# Altium PCB board.PcbDoc
Units mm, origin at the board's own origin, x right, y up, seen from the top; angles counter-clockwise.
Board outline 30 x 20 mm, 2 copper layers (Top Layer, Bottom Layer), stack 0.97 mm thick; 44 components, 34 nets, 193 pads, 61 vias.
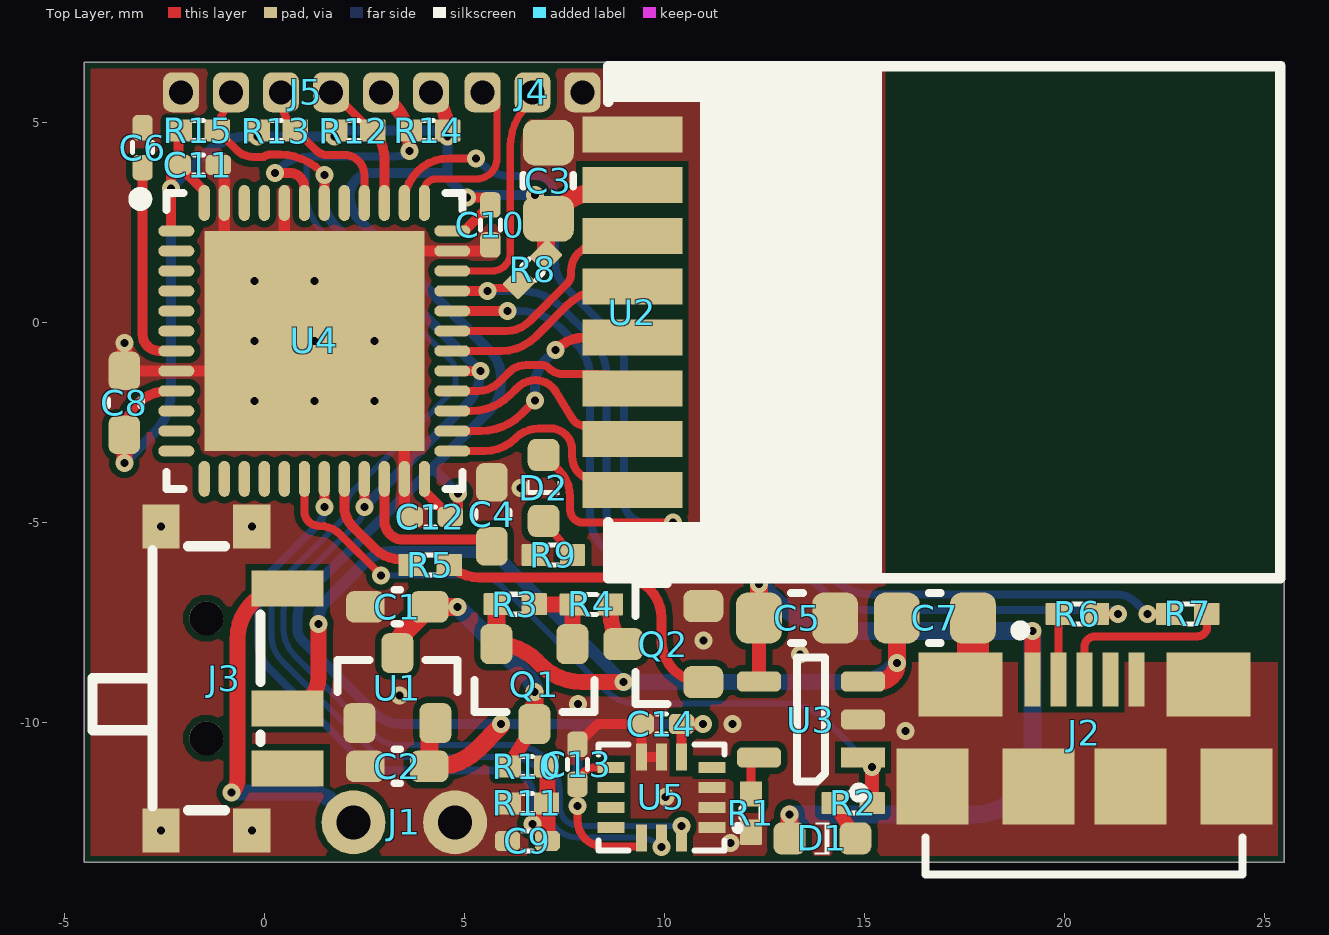
[diagram p0: Top Layer view]
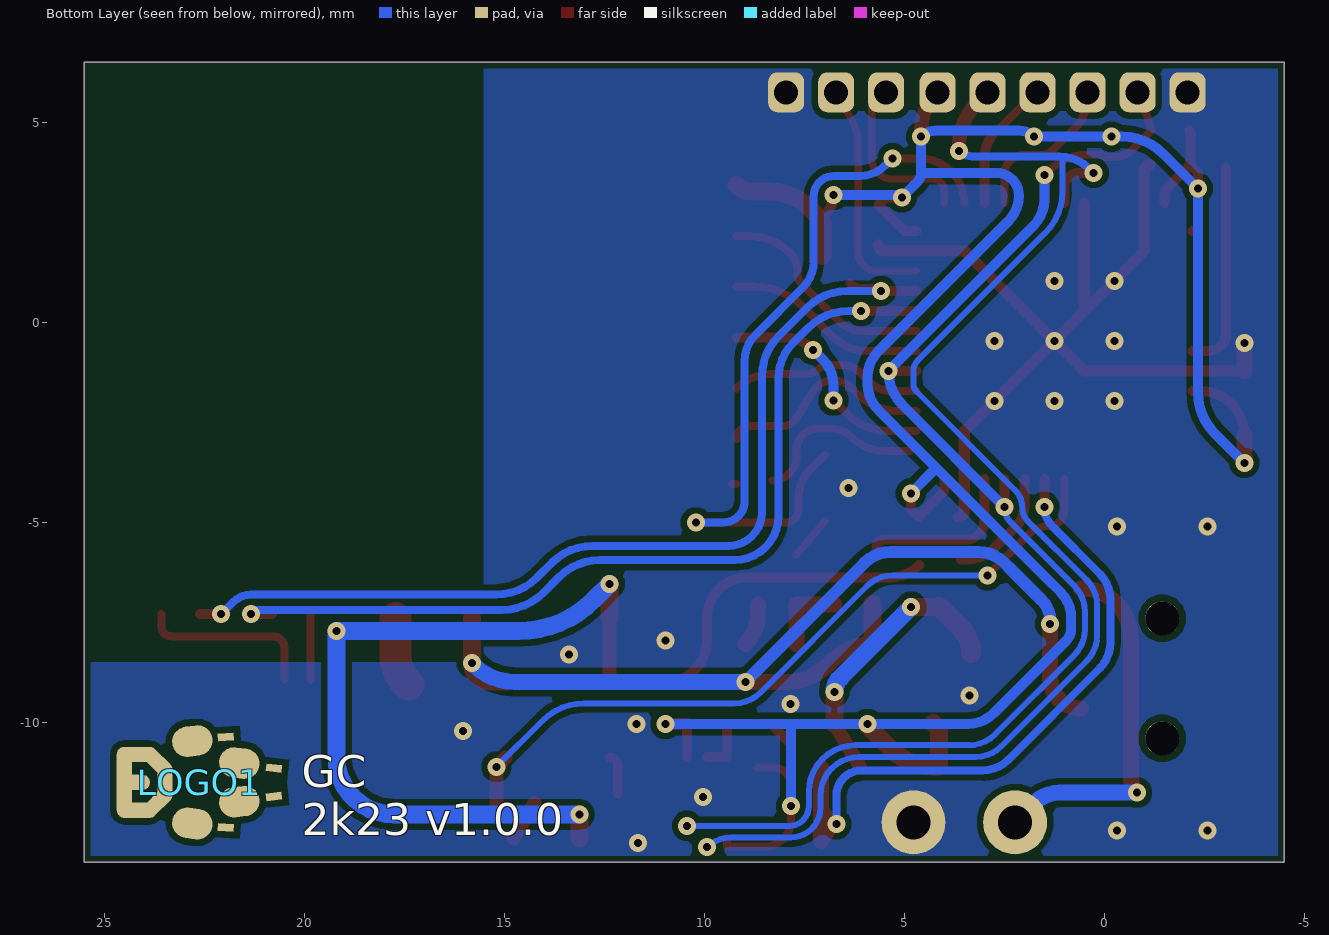
[diagram p1: Bottom Layer view, seen from below]
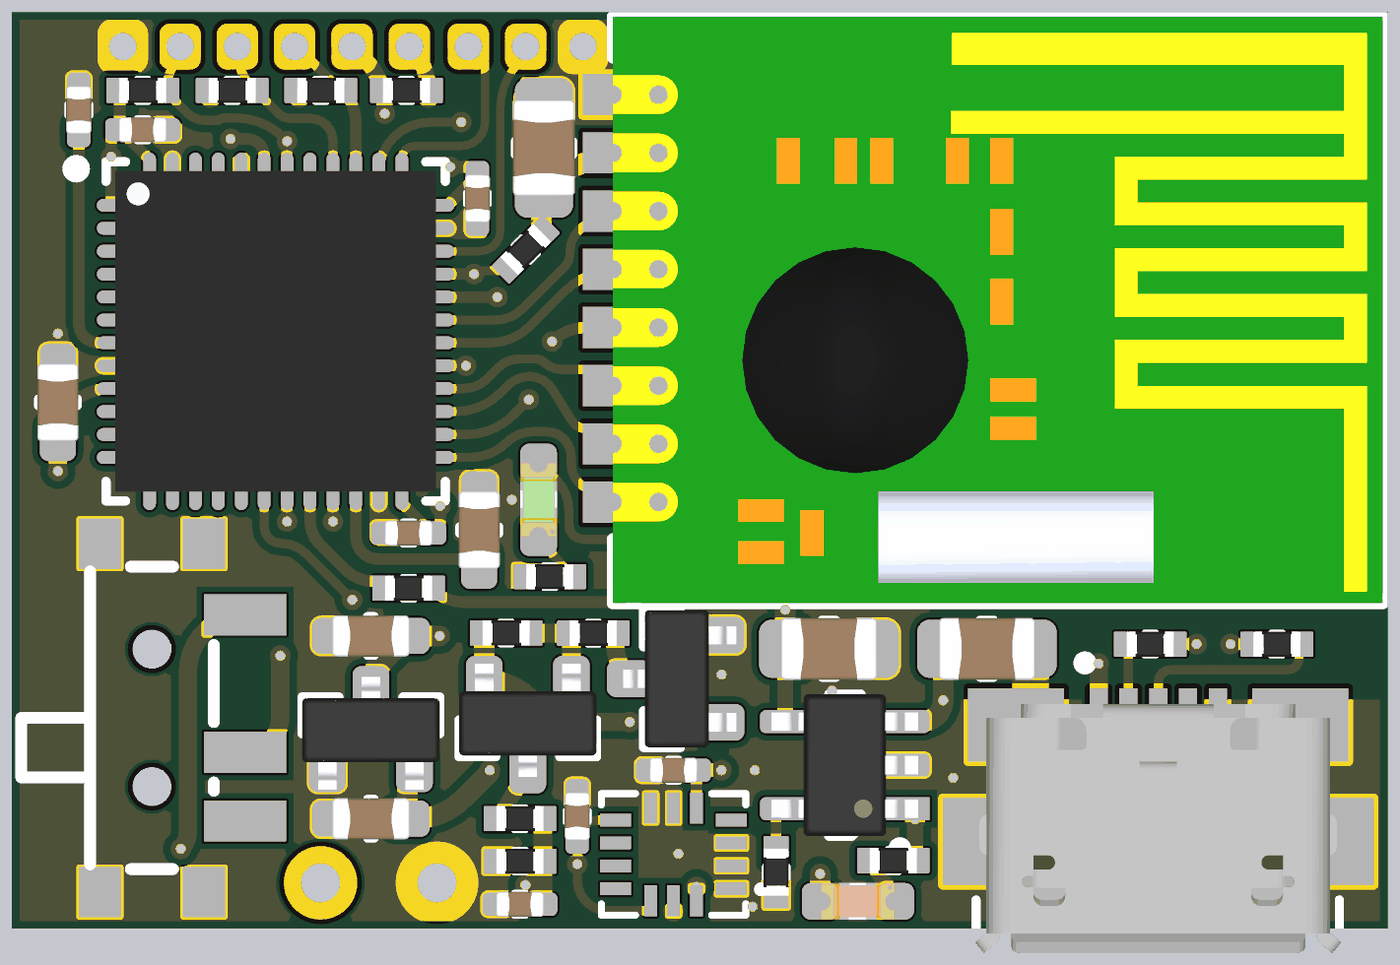
[diagram p2: 3D render of the assembled board from above, using the file's embedded part models]

## Layer stack, top to bottom
Top Solder: solder mask 0.0127, Solder Resist, Dk 3.8
Top Layer: signal copper 0.035
Dielectric: core 0.9, FR-4, Dk 4.5
Bottom Layer: signal copper 0.035
Bottom Solder: solder mask 0.0127, Solder Resist, Dk 3.8

## Board outline
-4.5,-13.5 25.5,-13.5 25.5,6.5 -4.5,6.5

## Design rules (kind name [scope] priority, off if disabled: settings)
AcuteAngle [All] p1: minimum=6.00000000000000E+0001 checktracksonly=FALSE
Clearance [All] p1: gap=0.16 ignorepadtopadclearanceinfootprint=FALSE except(0.13: Arc-Arc Arc-Track Arc-SMDPad Arc-Via Track-Track Track-SMDPad Track-Via SMDPad-SMDPad SMDPad-Via THPad-Via Via-Via; 0.15: Arc-THPad Arc-Text Arc-Hole Track-THPad Track-Text Track-Hole SMDPad-THPad SMDPad-Text SMDPad-Hole THPad-THPad THPad-Text THPad-Hole Via-Text Via-Hole Fill-Text Fill-Hole Poly-Text Poly-Hole Region-Text Region-Hole Text-Text Text-Hole)
ComponentClearance ComponentClearance_1 [HasFootprint('HDR-1X6_2.54') or HasFootprint('HDR-1x3-P1.25') or HasFootprint('HDR-1x6-P1.25') or HasFootprint('HDR-1X2_2.54') OR HasFootprint('LED-0603-RED') or HasFootprint('SOT-23')] p1: gap=-1 collisioncheckmode=3 verticalgap=2540 showdistances=FALSE
ComponentClearance ComponentClearance_2 [HasFootprint('TP2030_SMD')] p2: gap=-1 collisioncheckmode=3 verticalgap=2540 showdistances=FALSE
ComponentClearance [All] p3: gap=0.3 collisioncheckmode=3 verticalgap=0.254 showdistances=FALSE
HoleSize [All] p1: absolutevalues=TRUE maxlimit=6 minlimit=0.2 maxpercent=80.000 minpercent=20.000
HoleToHoleClearance HoleToHoleClearance_1 [IsVia vs IsThruPin] p1: gap=0.7 allowstackedmicrovias=TRUE
HoleToHoleClearance [All] p2: gap=0.5 allowstackedmicrovias=TRUE
MinimumSolderMaskSliver [All] p1 off: minsoldermaskwidth=0.254
PlaneClearance [All] p1: clearance=0.45
PlaneConnect [All] p1: planeconnectstyle=Direct reliefexpansion=0.3 reliefentries=4 reliefconductorwidth=0.381 reliefairgap=0.178
PolygonConnect [All] p1: connectstyle=Direct reliefconductorwidth=0.381 reliefentries=4 polygonreliefangle="90 Angle" airgapwidth=0.356
RoutingVias [All] p1: holewidth=0.3 width=0.6 viastyle="Through Hole" minholewidth=0.2 minwidth=0.45 maxholewidth=0.9 maxwidth=1.27
SilkToSilkClearance [All] p1 off: silktosilkclearance=0.254
SilkToSolderMaskClearance [IsPad] p1 off: minsilkscreentomaskgap=0.254 clearancetoexposedcopper=TRUE
SolderMaskExpansion [All] p1: expansion=0.102 istentingtop=FALSE
UnRoutedNet [All] p1: checkbadconnections=TRUE
Width [All] p1: maxlimit=3.81 minlimit=0.14 preferedwidth=0.254
21 further rules are at their usual default settings.

## Classes and differential pairs
component class schematic: C1 C2 C3 C4 C5 C6 C7 C8 C9 C10 C11 C12 C13 C14 D1 D2 J1 J2 J3 J4 J5 LOGO1 Q1 Q2 R1 R2 R4 R7 R9 R10 R11 R12 R13 R14 R15 U1 U2 U3 U4 U5

## Components (designator, comment, footprint, x,y, rotation, side; value= is the part's Value field where it differs from the comment)
C1 "10uF" C0603 3.327,-7.112 r0 top
C2 "10uF" C0603 3.327,-11.1 r0 top
C3 "10uF" C0805 7.101,3.539 r270 top
C4 "2.2u" C0603 5.69,-4.801 r270 top
C5 "1u" C0805 13.318,-7.391 r180 top
C6 "100nF" C0402 -3.044,4.367 r270 top
C7 "1u" C0805 16.764,-7.391 r180 top
C8 "2.2u" C0603 -3.5,-2.015 r270 top
C9 "100n" C0402 6.579,-12.967 r0 top
C10 "100nF" C0402 5.65,2.435 r90 top
C11 "100nF" C0402 -1.65,3.935 r180 top
C12 "100nF" C0402 4.15,-4.865 r0 top
C13 "100nF" C0402 7.828,-11.049 r270 top
C14 "100nF" C0402 9.928,-10.041 r0 top
D1 "RED" LED-0603-RED 13.95,-12.903 r180 top
D2 "GRN" LED-0603-GRN 6.985,-4.14 r90 top
J1 "Header 2" HDR-1X2_2.54 3.5,-12.5 r90 top
J2 "MICROQTJ" CONN-USB-MICRO_#1 20.5,-8.25 r270 top
J3 "MK-12C02-G025" SW-SMD_MK-12C02-G025 -1,-8.9 r270 top
J4 "SWD" HDR-1x3-P1.25 6.703,5.75 r0 top
J5 "CONN" HDR-1x6-P1.25 1.041,5.75 r180 top
LOGO1 "LOGO" LOGO 24.5,-11.5 r270 bottom
Q1 "IRLML6402" SOT-23#1 6.75,-9.046 r90 top
Q2 "IRLML2502" SOT-23#1 9.974,-8.046 r0 top
R1 "10k" R0402 12.167,-12.268 r270 top
R2 "220" R0402 14.722,-12.014 r180 top
R3 "100k" R0402 6.276,-7.048 r180 top
R4 "100" R0402 8.176,-7.051 r180 top
R5 "100" R0402 4.15,-6.071 r0 top
R6 "22" R0402 20.326,-7.29 r180 top
R7 "22" R0402 23.089,-7.29 r0 top
R8 "1k5" R0402 6.706,1.321 r225 top
R9 "220" R0402 7.227,-5.817 r0 top
R10 "1M" R0402 6.579,-11.1 r180 top
R11 "470k" R0402 6.579,-12.028 r0 top
R12 "2k" R0402 2.235,4.794 r0 top
R13 "2k" R0402 0.301,4.794 r0 top
R14 "2k" R0402 4.105,4.794 r180 top
R15 "2k" R0402 -1.65,4.794 r0 top
U1 "XC6206P332MR" SOT-23#2 3.327,-9.144 r270 top
U2 "RFM75" RFM75 17,0 r270 top
U3 "LGS4084HB5" SOT-23-5 13.665,-9.931 r0 top
U4 "STM32F401CBU6" UFQFPN-48_L7.0-W7.0 1.25,-0.465 r270 top
U5 "LSM6DSOTR" LGA-14_L3.0-W2.5-P0.50-TL 9.928,-11.879 r180 top

## Footprints (in the part's own frame and the unit in brackets; to place one, negate y for a bottom-side part, rotate by r counter-clockwise, add the part's x,y. Pads: shape width x height; smd on the part's side, far side on the other; paste and mask are expansions set on the pad)
C0402 [mm] "Chip Capacitor Body"
  rrect50% 0.635x0.508 smd mask+0.05: 1(-0.5,0) 2(0.5,0)
  silkscreen extent -0.13,-0.25 0.13,0.25, body extent -0.52,-0.27 0.53,0.28, height 0.55
C0603 [mil] "Chip Capacitor"
  rrect50% 38x31 smd mask+1.97: 1(-31.5,0) 2(31.5,0)
  silkscreen extent -3,-17 3,17, body extent -33,-18 33,18, height 35
C0805 [mil] "Chip Capacitor"
  rrect50% 45x50 smd mask+1.97: 1(-37.5,0) 2(37.5,0)
  silkscreen extent -6,-25 6,25, body extent -41,-27 41,27, height 53
CONN-USB-MICRO_#1 [mm] "Connector; USB2.0, Type B, SM; 5 Position; Right Angle"
  rect 1.35x0.4 smd: 1(0.675,-1.3) 2(0.675,-0.65) 3(0.675,0) 4(0.675,0.65) 5(0.675,1.3)
  rect 1.6x2.1 smd: 6(0.8,3.1) 6(0.8,-3.1)
  rect 1.9x1.8 smd: 6(3.35,3.8) 6(3.35,-1.15) 6(3.35,1.15) 6(3.35,-3.8)
  silkscreen extent -0.67,-3.98 5.55,3.95, body extent 0.35,-3.99 5.78,3.99, height 2.69
HDR-1X2_2.54 [mm]
  round 1.6 hole 0.85: 1(0,1.27) 2(0,-1.27)
HDR-1x3-P1.25 [mm]
  rrect50% 0.9x1 hole 0.6: 1(-1.25,0) 2(0,0) 3(1.25,0)
HDR-1x6-P1.25 [mm]
  rrect50% 0.9x1 hole 0.6: 1(-3.125,0) 2(-1.875,0) 3(-0.625,0) 4(0.625,0) 5(1.875,0) 6(3.125,0)
LED-0603-GRN [mm]
  rrect50% 0.8x0.8 smd mask+0.05: 1(0.825,0) 2(-0.825,0)
  silkscreen extent -0.18,-0.4 0.2,0.4, body extent -0.8,-0.4 0.8,0.4, height 0.6
LED-0603-RED [mm]
  rrect50% 0.8x0.8 smd paste+0 mask+0.05: 1(0.825,0) 2(-0.825,0)
  silkscreen extent -0.18,-0.4 0.2,0.4, body extent -0.8,-0.4 0.8,0.4, height 0.6
LGA-14_L3.0-W2.5-P0.50-TL [mm]
  rect 0.675x0.28 smd paste+0 mask+0.051: 1(-1.262,0.75) 2(-1.262,0.25) 3(-1.262,-0.25) 4(-1.262,-0.75) 8(1.262,-0.75) 9(1.262,-0.25) 10(1.262,0.25) 11(1.262,0.75)
  rect 0.28x0.675 smd paste+0 mask+0.051: 5(-0.5,-1.012) 6(0,-1.012) 7(0.5,-1.012) 12(0.5,1.012) 13(0,1.012) 14(-0.5,1.012)
  silkscreen extent -1.98,-1.33 1.58,1.33, body extent -1.5,-1.25 1.5,1.25, height 0.8
LOGO [mil]
  rect 15.75x7.87 smd rot 93 mask+4: ""(-44.55,100)
  oval 30x40 smd rot 8 mask+4: ""(-40.55,67)
  oval 15x39.5 smd mask+4: ""(-27.5,12.5) ""(27.5,12.5)
  oval 15x36.21 smd rot 135 mask+4: ""(-20,32.5)
  oval 30x40 smd rot 173 mask+4: ""(-18.99,113.27)
  rect 15.75x7.87 smd rot 83 mask+4: ""(-13.91,147.15)
  oval 70x15 smd mask+4: ""(0,0)
  oval 15x32.5 smd mask+4: ""(0,9)
  oval 39.5x15 smd mask+4: ""(0,40)
  rect 15.75x7.87 smd rot 97 mask+4: ""(13.91,147.15)
  oval 30x40 smd rot 7 mask+4: ""(18.99,113.27)
  oval 15x36.21 smd rot 45 mask+4: ""(20,32.5)
  oval 30x40 smd rot 172 mask+4: ""(40.55,67)
  rect 15.75x7.87 smd rot 87 mask+4: ""(44.55,100)
R0402 [mm]
  rrect10% 0.635x0.55 smd mask+0.05: 1(-0.476,0) 2(0.476,0)
  silkscreen extent -0.12,-0.25 0.13,0.25, body extent -0.52,-0.27 0.53,0.28, height 0.4
RFM75 [mm]
  rect 0.9x2.5 smd: 1(-4.7,-7.8) 2(-3.43,-7.8) 3(-2.16,-7.8) 4(-0.89,-7.8) 5(0.38,-7.8) 6(1.65,-7.8) 7(2.92,-7.8) 8(4.19,-7.8)
  silkscreen extent -6.4,-8.4 6.4,8.4, body extent -6.4,-8.4 6.4,8.4, height 3.01
SOT-23#1 [mm]
  rrect50% 1x0.8 smd mask+0.05: 1(1,-0.95) 2(1,0.95) 3(-1,0)
  silkscreen extent -0.7,-1.5 0.1,1.5, body extent -1.27,-1.5 1.33,1.5, height 1.1
SOT-23#2 [mm]
  rrect50% 1x0.8 smd mask+0.05: 1(0.875,-0.95) 2(0.875,0.95) 3(-0.875,0)
  silkscreen extent -0.7,-1.5 0.1,1.5, body extent -1.27,-1.5 1.33,1.5, height 1.1
SOT-23-5 [mm]
  rect 1.1x0.5 smd mask+0.05: 1(1.3,-0.95)
  rrect50% 1.1x0.5 smd mask+0.05: 2(1.3,0) 3(1.3,0.95) 4(-1.3,0.95) 5(-1.3,-0.95)
  silkscreen extent -0.35,-1.95 1.33,1.55, body extent -1.6,-1.55 1.6,1.55, height 1.45
SW-SMD_MK-12C02-G025 [mm]
  rect 0.9x1.8 smd paste+0 mask+0.051: 1(-2.25,1.583) 2(0.75,1.583) 3(2.25,1.583)
  rect 1.1x0.93 smd paste+0 mask+0.051: 4(3.8,0.687) 5(3.8,-1.583) 6(-3.8,-1.583) 7(-3.8,0.687)
  round 0.85 hole 0.85 unplated paste-2539.97: ""(-1.5,-0.448) ""(1.5,-0.448)
  silkscreen extent -3.3,-3.3 3.3,0.9, body extent -3.3,-3.3 3.3,0.9, height 1.4
UFQFPN-48_L7.0-W7.0 [mm]
  oval 0.28x0.9 smd paste+0 mask+0.051: 1(-2.751,-3.449) 2(-2.25,-3.449) 3(-1.75,-3.449) 4(-1.25,-3.449) 5(-0.749,-3.449) 6(-0.249,-3.449) 7(0.249,-3.449) 8(0.749,-3.449) 9(1.25,-3.449) 10(1.75,-3.449) 11(2.251,-3.449) 12(2.751,-3.449) 25(2.751,3.449) 26(2.251,3.449) 27(1.75,3.449) 28(1.25,3.449) 29(0.749,3.449) 30(0.249,3.449) 31(-0.249,3.449) 32(-0.749,3.449) 33(-1.25,3.449) 34(-1.75,3.449) 35(-2.25,3.449) 36(-2.751,3.449)
  oval 0.9x0.28 smd paste+0 mask+0.051: 13(3.449,-2.751) 14(3.449,-2.25) 15(3.449,-1.75) 16(3.449,-1.25) 17(3.449,-0.749) 18(3.449,-0.249) 19(3.449,0.249) 20(3.449,0.749) 21(3.449,1.25) 22(3.449,1.75) 23(3.449,2.25) 24(3.449,2.751) 37(-3.449,2.751) 38(-3.449,2.25) 39(-3.449,1.75) 40(-3.449,1.25) 41(-3.449,0.749) 42(-3.449,0.249) 43(-3.449,-0.249) 44(-3.449,-0.749) 45(-3.449,-1.25) 46(-3.449,-1.75) 47(-3.449,-2.25) 48(-3.449,-2.751)
  rect 5.5x5.5 smd paste+0 mask+0.051: 49(0,0)
  silkscreen extent -3.7,-4.5 3.7,3.7, body extent -3.5,-3.5 3.5,3.5, height 1

## Part data
C1 C2 C3 C6 C10 C11 C12: library part CAP
C4 C5 C7 C8 C9: library part Cap
C13 C14: library part CAP, LCSC part number=C131394, P/N=CC0402KRX7R9BB104
D1: library part LED-0603-RED, "LED 0603 RED"
D2: library part LED-0603-GREEN, "LED 0603 GRN"
J3: LCSC part number=C778186, P/N=MK-12C02-G025
J4 J5: library part "Header 3"
Q1 Q2: library part 2N7002
R1 R2 R3 R4 R5 R6 R7 R8 R9 R10 R11: library part Res1
R12 R13 R14 R15: library part RES
U1: library part Component_4_1
U4: LCSC part number=C118825, P/N=STM32F401CBU6
U5: LCSC part number=C2655100, P/N=LSM6DSOTR

## Via types
v1: diameter 0.45, hole 0.2, Top Layer to Bottom Layer, tented both sides, 61 vias

## Nets (pads, with @x,y where several pads share a name; then routed paths per layer and width w, separated by ;. In a path a pad name is that pad's centre, name@x,y a point inside that pad or via, vN(x,y) a via of type N, cw(c..) or ccw(c..) an arc to the next point about the centre after c; other vN are vias at no path point)
3V3: C2.2 C3.2 C8.2 C10.2 C11.2 C12.2 C13.2 C14.2 J5.1 R8.1 R12.1 R13.1 R14.1 R15.1 U1.2 U2.2 U4.1 U4.9 U4.24 U4.36 U4.48 U5.5 U5.8 U5.12 | length 73.7
  Top Layer w0.2: U5.8 8.284,-11.129 ccw(c8.284,-11.585) 7.828,-11.585 v1(7.828,-12.093) 7.828,-12.444 ccw(c8.492,-12.444) 8.492,-13.108 9.428,-13.108 U5.12
  Top Layer w0.25: C8.2 cw(c-2.4,-2.815) -2.4,-1.715 U4.9 ; U4.1 -2.338,2.286 v1(-2.338,3.347) -2.338,3.747 C11.2 ; R15.1 ccw(c-2.068,4.736) -2.15,4.736 C11.2 ; U4.48 -1.501,3.286 C11.2 ; U4.24 4.001,-4.216 C12.2 4.838,-4.677 v1(4.838,-4.277) ; U4.36 5.001,2.286 C10.2 5.462,3.123 v1(5.062,3.123) ; v1(6.771,3.185) ccw(c7.418,3.185) 6.96,2.727 C3.2 ; U5.5 C14.2
  Top Layer w0.3: C14.2 v1(10.972,-10.041)
  Top Layer w0.35: J5.1 4.198,5.718 cw(c3.274,4.794) R14.1
  Top Layer w0.4: v1(-3.5,-3.515) C8.2
  Top Layer w0.45: U1.2 4.127,-10.169 C2.2 4.304,-11.1 ccw(c4.304,-9.652) 5.328,-10.676 v1@5.92,-10.084 ; R8.1 7.042,2.445 cw(c7.242,2.445) C3.2 7.363,2.848 cw(c8.386,1.824) 8.386,3.272 8.819,3.272 ccw(c8.819,3.811) U2.2
  Bottom Layer w0.25: v1(-3.5,-3.515) -2.763,-2.777 ccw(c-3.786,-1.753) -2.338,-1.753 v1(-2.338,3.347) -1.468,4.217 cw(c-0.444,3.194) -0.444,4.642 v1(-0.175,4.642) v1(1.759,4.642) cw(c2.127,4.274) 2.127,4.794 4.213,4.794 cw(c4.213,4.274) v1(4.581,4.642) 4.581,3.734 ; 4.212,-3.651 v1(4.838,-4.277) ; v1(6.771,3.185) 5.123,3.185 v1(5.062,3.123) 4.673,3.512 cw(c4.894,3.734) 4.581,3.734 ; v1(7.828,-12.093) 7.828,-10.041 ; v1(10.972,-10.041) 7.828,-10.041 ; 4.581,3.734 2.695,3.734 ccw(c2.695,3.173) 2.134,3.173 ccw(c3.048,3.173) 2.401,2.526 5.65,-0.723 cw(c5.004,-1.369) 5.918,-1.369 5.918,-1.543 cw(c5.004,-1.543) 5.65,-2.19 1.457,-6.383 1.095,-6.745 ccw(c1.742,-7.391) 0.827,-7.391 0.827,-7.657 ccw(c1.256,-7.657) 0.953,-7.961 2.766,-9.774 ccw(c3.412,-9.127) 3.412,-10.041 v1(5.92,-10.041) 7.828,-10.041
5V: C5.2 D1.1 J2.1 U3.4 | length 21.5
  Top Layer w0.35: U3.4 C5.2
  Top Layer w0.4: J2.1 v1(19.2,-7.717)
  Top Layer w0.45: C5.2 v1(12.365,-6.539) ; D1.1 v1(13.125,-12.305)
  Bottom Layer w0.45: v1(12.365,-6.539) 12.768,-6.942 ccw(c14.64,-5.07) 14.64,-7.717 v1(19.2,-7.717) 19.2,-10.857 cw(c17.752,-10.857) 17.752,-12.305 v1(13.125,-12.305)
CE: U2.3 U4.31 | length 5.6
  Top Layer w0.2: U4.31 6.05,-0.216 ccw(c6.05,0.6) 6.627,0.023 7.563,0.959 ccw(c7.303,1.219) 7.671,1.219 7.671,1.286 cw(c8.308,1.286) 7.857,1.736 cw(c8.881,0.712) 8.881,2.16 U2.3
CHRG: R2.1 U3.1 U4.18 | length 18.9
  Top Layer w0.2: U4.18 1.001,-4.725 ccw(c1.365,-4.725) 1.156,-5.022 ccw(c1.365,-4.725) 1.365,-5.089 cw(c1.365,-5.861) 1.911,-5.315 v1(2.921,-6.325)
  Top Layer w0.35: U3.1 v1(15.198,-11.114) R2.1
  Bottom Layer w0.15: v1@2.794,-6.325 v1@2.857,-6.388 ; v1(2.921,-6.325) 5.285,-6.325 cw(c5.285,-7.239) 5.932,-6.592 8.597,-9.257 ccw(c9.243,-8.611) 9.243,-9.525 13.009,-9.525 cw(c13.009,-10.973) 14.033,-9.949 v1(15.198,-11.114)
CSN: U2.4 U4.30 | length 5
  Top Layer w0.2: U4.30 5.934,-0.714 ccw(c5.934,0.482) 6.78,-0.364 7.536,0.392 cw(c8.737,-0.809) 8.737,0.89 U2.4
DM: J2.2 R6.2 | length 1.6
  Top Layer w0.2: J2.2 R6.2
DP: J2.3 R7.2 | length 4.5
  Top Layer w0.2: J2.3 20.5,-8.126 cw(c20.777,-8.126) 20.777,-7.849 23.33,-7.849 ccw(c23.33,-7.607) 23.572,-7.596 R7.2
GND: C1.1 C2.1 C3.1 C4.1 C5.1 C6.1 C7.1 C8.1 C9.1 C10.1 C11.1 C12.1 C13.1 C14.1 J1.2 J2.5 J2.6 J3.4 J3.5 J3.6 J3.7 J4.3 J5.6 Q2.2 R1.2 R9.1 R11.1 U1.1 U2.1 U3.2 U4.8 U4.23 U4.35 U4.44 U4.47 U4.49 U5.1 U5.2 U5.3 U5.6 U5.7 | length 29.6
  Top Layer w0.25: C13.1 8.336,-10.041 C14.1 U5.7 U5.6
  Top Layer w0.28: C8.1 U4.8 0.501,-1.214 v1(1.25,-0.465) ; C11.1 cw(c-1.15,3.785) -1,3.785 U4.47 -1,1.785 U4.49@0.501,0.284 ; U4.44 U4.49@0.501,0.284 ; C12.1 cw(c3.65,-4.716) 3.5,-4.716 U4.23 3.5,-2.716 v1(1.25,-0.465) ; C10.1 cw(c5.5,1.935) 5.5,1.785 U4.35 3.5,1.785 v1(1.25,-0.465) ; U4.49@0.501,0.284 v1(1.25,-0.465)
  Top Layer w0.4: C8.1 v1(-3.5,-0.514)
  Top Layer w0.8: J2.6@17.4,-9.05 17.449,-9.001 ccw(c16.802,-8.355) 17.716,-8.355 C7.1
  other v1: 11.653,-13.021 -2.583,-12.7 -0.313,-12.7 10.033,-11.862 16.027,-10.211 11.7,-10.041 7.84,-9.545 3.376,-9.336 13.386,-8.306 10.974,-7.953 -2.583,-5.1 -0.313,-5.1 6.401,-4.14 -0.25,-1.965 1.25,-1.965 2.75,-1.965 -0.25,-0.465 2.75,-0.465 -0.25,1.035 1.25,1.035
IRQ: U2.8 U4.25 | length 4.5
  Top Layer w0.2: U4.25@4.865,-3.216 5.503,-3.216 ccw(c5.503,-2.104) 6.289,-2.89 cw(c6.861,-3.461) 6.861,-2.654 7.154,-2.654 cw(c7.154,-3.196) 7.696,-3.196 7.696,-3.355 ccw(c8.293,-3.355) 7.743,-3.587 ccw(c8.293,-3.355) U2.8@8.293,-3.951 ; U2.8@9.2,-4.043 U2.8@9.305,-4.043
LED0: D2.1 U4.38 | length 19
  Top Layer w0.2: U4.38 cw(c4.617,2.984) 4.617,4.1 v1(5.298,4.1) ; D2.1 7.367,-3.698 cw(c6.696,-4.369) 7.645,-4.369 7.645,-4.686 ccw(c7.963,-4.686) 7.963,-5.004 v1(10.211,-5.004)
  Bottom Layer w0.2: v1(5.298,4.1) 5.473,3.925 ccw(c6.119,4.572) 6.119,3.658 6.762,3.658 cw(c6.762,3.156) 7.264,3.156 7.264,1.522 ccw(c8.179,1.522) 7.532,0.875 8.724,-0.316 cw(c8.077,-0.963) 8.992,-0.963 8.992,-4.47 ccw(c9.525,-4.47) 9.525,-5.004 v1(10.211,-5.004)
MISO: U2.7 U4.27 | length 5.5
  Top Layer w0.2: U4.27 5.169,-2.215 ccw(c5.169,-0.828) 6.15,-1.809 6.32,-1.639 ; 6.32,-1.639 cw(c6.782,-2.101) 6.782,-1.448 cw(c6.782,-2.037) 7.292,-1.742 7.695,-2.395 ccw(c8.037,-2.198) 8.037,-2.593 8.873,-2.593 cw(c8.873,-2.92) U2.7
MOSI: U2.6 U4.28 | length 4.9
  Top Layer w0.2: U4.28 5.345,-1.715 ccw(c5.345,-0.977) 5.867,-1.499 6.12,-1.246 cw(c6.553,-1.68) 6.553,-1.067 6.928,-1.067 cw(c6.928,-1.327) 7.112,-1.143 ccw(c7.478,-0.777) 7.478,-1.295 8.342,-1.295 cw(c8.342,-2.508) U2.6
NetC4_2: C4.2 U4.22 | length 4.1
  Top Layer w0.25: U4.22 3,-4.956 ccw(c3.48,-4.956) 3.48,-5.436 5.524,-5.436 cw(c5.524,-5.601) C4.2
NetC6_2: C6.2 U4.7 | length 5.2
  Top Layer w0.25: C6.2 -3.044,-0.299 ccw(c-2.628,-0.299) -2.628,-0.714 U4.7
NetD1_2: D1.2 R2.2 | length 1
  Top Layer w0.35: R2.2 D1.2
NetD2_2: D2.2 R9.2 | length 1.1
  Top Layer w0.2: D2.2 R9.2
NetQ1_1: Q1.1 R3.1 R4.2 | length 1.9
  Top Layer w0.4: R3.1 6.755,-7.051 R4.2 Q1.1
NetQ2_1: Q2.1 R5.2 | length 8.2
  Top Layer w0.25: R5.2 ccw(c5.362,-5.334) 5.362,-6.375 8.917,-6.375 cw(c8.917,-7.389) 9.931,-7.389 9.931,-7.953 ccw(c10.974,-7.953) Q2.1
NetQ2_3: Q2.3 R4.1 | length 1.1
  Top Layer w0.4: R4.1 8.652,-7.268 ccw(c9.753,-7.268) Q2.3
NetR1_1: R1.1 U3.5 | length 1
  Top Layer w0.23: R1.1 12.167,-11.08 cw(c12.365,-11.08) U3.5
NetR6_1: R6.1 U4.32 | length 22.6
  Top Layer w0.25: U4.32 v1(6.085,0.284) ; R6.1 v1(21.338,-7.29)
  Bottom Layer w0.2: v1(6.085,0.284) 6.381,0.284 cw(c6.381,-1.164) 7.404,-0.14 7.785,-0.52 cw(c6.908,-1.397) 8.148,-1.397 8.148,-4.846 ccw(c9.246,-4.846) 9.246,-5.944 12.608,-5.944 cw(c12.608,-7.391) 13.632,-6.368 14.029,-6.764 ccw(c15.052,-5.74) 15.052,-7.188 21.236,-7.188 cw(c21.236,-7.29) v1(21.338,-7.29)
NetR7_1: R7.1 R8.2 U4.33 | length 24.2
  Top Layer w0.2: v1@5.66,0.785 v1(5.577,0.785) cw(c5.756,0.606) 5.756,0.859 6.066,0.859 ccw(c6.066,1.287) R8.2
  Top Layer w0.25: U4.33 v1@5.399,0.785 ; v1(22.077,-7.29) R7.1
  Bottom Layer w0.2: v1(5.577,0.785) 6.414,0.785 cw(c6.414,-0.663) 7.437,0.36 8.136,-0.338 cw(c7.112,-1.361) 8.56,-1.361 8.56,-4.75 ccw(c9.398,-4.75) 9.398,-5.588 12.786,-5.588 cw(c12.786,-7.036) 13.81,-6.012 14.181,-6.383 ccw(c15.205,-5.359) 15.205,-6.807 21.336,-6.807 cw(c21.336,-7.431) 21.777,-6.99 v1(22.077,-7.29)
PWR_ON: R5.1 U4.20 | length 2.9
  Top Layer w0.25: U4.20 1.999,-4.603 ccw(c2.705,-4.603) 2.206,-5.102 2.762,-5.657 ccw(c3.408,-5.011) R5.1@3.408,-5.925 ; R5.1@3.408,-5.928 R5.1@3.581,-5.928
SCK: U2.5 U4.26 | length 5.8
  Top Layer w0.2: U4.26 5.409,-2.716 ccw(c5.409,-1.268) 6.433,-2.292 v1(6.771,-1.954)
  Top Layer w0.25: v1(7.279,-0.686) cw(c8.017,-1.424) 8.017,-0.38 U2.5
  Bottom Layer w0.25: v1(6.771,-1.954) 6.771,-1.573 cw(c7.685,-1.573) 7.039,-0.926 v1(7.279,-0.686)
SCL: J5.5 R15.2 U4.21 U4.29 U4.42 U5.14 | length 33.8
  Top Layer w0.2: R15.2 R15.2@-1.164,4.784 ; J5.5@-0.954,5.629 J5.5 ; J5.5@-0.754,5.629 ccw(c0.259,4.616) R15.2@-1.164,4.784 ; v1(1.499,3.684) 1.416,3.767 ccw(c0.392,2.743) 0.392,4.191 0.12,4.191 ccw(c0.12,4.01) -0.008,4.138 -0.287,4.138 cw(c-0.287,4.695) -0.681,4.301 R15.2@-1.164,4.784
  Top Layer w0.25: U4.42 v1(1.499,3.684) ; v1(2.5,-4.614) U4.21 ; U4.29 v1(5.399,-1.214)
  Bottom Layer w0.15: v1(2.5,-4.614) cw(c1.953,-4.614) 2.34,-5.001 0.75,-6.59 ccw(c1.397,-7.237) 0.483,-7.237 0.483,-7.673 ccw(c1.397,-7.673) 0.75,-8.32 2.736,-10.305 ccw(c3.383,-9.659) 3.383,-10.573 6.22,-10.573 cw(c6.22,-11.74) 7.387,-11.74 7.387,-12.101 ccw(c7.873,-12.101) 7.467,-12.368 ccw(c7.873,-12.101) 7.873,-12.587 v1(10.428,-12.587)
  Bottom Layer w0.25: v1(1.499,3.684) 1.499,3.065 ccw(c2.413,3.065) 1.767,2.418 2.029,2.156 v1(5.399,-1.214) cw(c4.191,-1.214) 5.045,-2.069 v1(2.5,-4.614)
SDA1: J5.2 R14.2 U4.43 U5.13 | length 34.3
  Top Layer w0.25: v1(0.264,3.735) 0.633,3.735 cw(c0.633,3.367) 1.001,3.367 U4.43
  Top Layer w0.35: J5.2 3.205,5.461 cw(c2.181,4.438) 3.629,4.438 v1(3.629,4.286)
  Bottom Layer w0.15: 1.05,4.14 1.05,3.258 ccw(c2.497,3.258) 1.474,2.235 4.674,-0.965 cw(c4.428,-1.21) 4.775,-1.21 4.775,-1.539 cw(c4.506,-1.539) 4.696,-1.73 2.235,-4.191 ccw(c2.678,-4.634) 2.052,-4.634 cw(c1.578,-4.634) 1.913,-4.969 0.446,-6.436 ccw(c1.092,-7.083) 0.178,-7.083 0.178,-7.825 ccw(c1.092,-7.825) 0.446,-8.472 2.57,-10.596 ccw(c3.216,-9.95) 3.216,-10.864 6.127,-10.864 cw(c6.127,-11.835) 7.098,-11.835 7.098,-12.144 ccw(c7.832,-12.144) 7.246,-12.585 ccw(c7.832,-12.144) 7.832,-12.878 9.343,-12.878 cw(c9.343,-13.706) v1(9.928,-13.12)
  Bottom Layer w0.2: v1@0.273,3.728 cw(c1.134,3.057) 1.134,4.149 3.298,4.149 ccw(c3.298,4.617) v1(3.629,4.286)
SDA2: J5.3 R12.2 U4.39 | length 3.3
  Top Layer w0.2: J5.3 cw(c1.666,5.638) 1.745,5.717 2.669,4.794 R12.2
  Top Layer w0.25: R12.2 cw(c2.014,4.097) 3,4.097 U4.39
SDA3: J5.4 R13.2 U4.40 | length 4
  Top Layer w0.2: J5.4 0.416,5.666 ccw(c1.65,5.666) R13.2 ; R13.2@0.79,4.807 1.306,4.291 ccw(c1.563,4.547) 1.563,4.184 2,4.184 cw(c2,3.684) 2.5,3.684 U4.40
SNS_BAT: C9.2 R10.1 R11.2 U4.19 | length 16
  Top Layer w0.2: R10.1 cw(c7.055,-11.124) R10.1@7.079,-11.124
  Top Layer w0.25: v1(1.499,-4.614) U4.19
  Top Layer w0.4: C9.2 7.079,-12.028 R10.1@7.079,-11.124
  Bottom Layer w0.2: v1(1.499,-4.614) cw(c0.805,-4.614) 1.296,-5.105 0.115,-6.285 ccw(c0.762,-6.932) -0.152,-6.932 -0.152,-8.003 ccw(c0.762,-8.003) 0.115,-8.65 2.399,-10.934 ccw(c3.046,-10.287) 3.046,-11.201 6.069,-11.201 cw(c6.069,-11.831) 6.699,-11.831 v1(6.699,-12.547)
SWCLK: J4.1 U4.37 | length 4.5
  Top Layer w0.18: U4.37 4.001,3.302 cw(c4.28,3.302) 4.28,3.581 5.298,3.581 ccw(c5.298,4.1) 5.817,4.1 5.817,5.387 ccw(c5.453,5.387) 5.639,5.699 ccw(c5.453,5.387) J4.1 J4.1@5.439,5.75
SWDIO: J4.2 U4.34 | length 6
  Top Layer w0.18: U4.34 5.7,1.285 ccw(c5.7,1.735) 6.15,1.735 6.15,4.397 cw(c7.598,4.397) J4.2@6.574,5.421 ; J4.2@6.374,5.421 J4.2
VB: J1.1 J3.1 | length 9.2
  Top Layer w0.4: v1(-0.817,-11.757) ccw(c-1.185,-11.389) -0.665,-11.389 -0.665,-7.898 cw(c0.583,-7.898) J3.1
  Bottom Layer w0.4: v1(-0.817,-11.757) 1.108,-11.757 cw(c1.108,-12.671) 1.755,-12.025 J1.1
VBAT: C7.2 J3.2 Q1.2 R3.2 U3.3 | length 26
  Top Layer w0.4: J3.2 ccw(c0.583,-8.881) 1.352,-8.881 v1(1.352,-7.542) ; Q1.2 cw(c5.8,-9.483) 6.816,-8.467 6.917,-8.568 ccw(c7.94,-7.544) 7.94,-8.992 v1(8.974,-8.992)
  Top Layer w0.45: Q1.2 R3.2 ; U3.3 15.348,-8.981 ccw(c15.348,-8.518) v1(15.811,-8.518) C7.2
  Bottom Layer w0.3: v1@1.362,-7.541 cw(c2.044,-7.441) 1.557,-6.954 2.307,-6.203 2.502,-6.008 cw(c3.148,-6.655) 3.148,-5.74 5.344,-5.74 cw(c5.344,-6.655) 5.991,-6.008 v1(8.974,-8.992)
  Bottom Layer w0.4: v1(8.974,-8.992) 14.738,-8.992 ccw(c14.738,-7.544) 15.762,-8.568 v1(15.811,-8.518)
VSYS: C1.2 Q1.3 R10.2 U1.3 | length 7.1
  Top Layer w0.35: R10.2 Q1.3
  Top Layer w0.45: C1.2 v1(4.827,-7.112) ; Q1.3 v1(6.75,-9.245)
  Top Layer w0.5: U1.3 cw(c4.189,-8.269) 3.58,-7.66 C1.2
  Bottom Layer w0.45: v1(4.827,-7.112) 6.601,-8.886 cw(c6.243,-9.245) v1(6.75,-9.245)
pads on no net: J2.4 J3. J3.3 LOGO1. U4.2 U4.3 U4.4 U4.5 U4.6 U4.10 U4.11 U4.12 U4.13 U4.14 U4.15 U4.16 U4.17 U4.41 U4.45 U4.46 U5.4 U5.9 U5.10 U5.11

## Polygon pours and split planes (outlines as drawn)
GND on Top Layer "NONET_L02_P-001" (solid, remove dead copper, pour order 2): -4.5,6.5 -4.5,-13.5 25.5,-13.5 25.5,6.5
GND on Bottom Layer "NONET_L02_P-001" (solid, remove dead copper, pour order 3): -4.5,6.5 -4.5,-13.5 25.5,-13.5 25.5,6.5

## Keep-outs
Keep-Out Layer:
  the board outline again, w0.001

## Other copper
Top Layer:
  region net SNS_BAT: 7.017,-12.028 6.647,-12.398 6.647,-12.444 ccw(c7.368,-12.444) 6.858,-12.954 ccw(c6.889,-12.923) 6.889,-12.967 7.079,-12.967 7.079,-12.028
Multi-Layer:
  pour cut-out: 15.52,-8.5 25.7,-8.5 25.7,8.5 15.52,8.5

## Silkscreen, mask and mechanical layers (free items; w line width, h text height)
Bottom Overlay:
  text "GC / 2k23 v1.0.0" at 20.07,-12.82 h0.8

## Dimensions
-4.5,-13.5 to -4.5,6.5 on Mechanical 2
-4.5,-13.5 to 25.5,-13.5 on Mechanical 2

## Text inside footprints (layer, text, board x,y; h text height)
J2: Mechanical 1 "PCB Edge" at 16.8,-13.475 h0.25